# EAGLE board arm shield design mirrored along length (EAGLE 7.2.0)
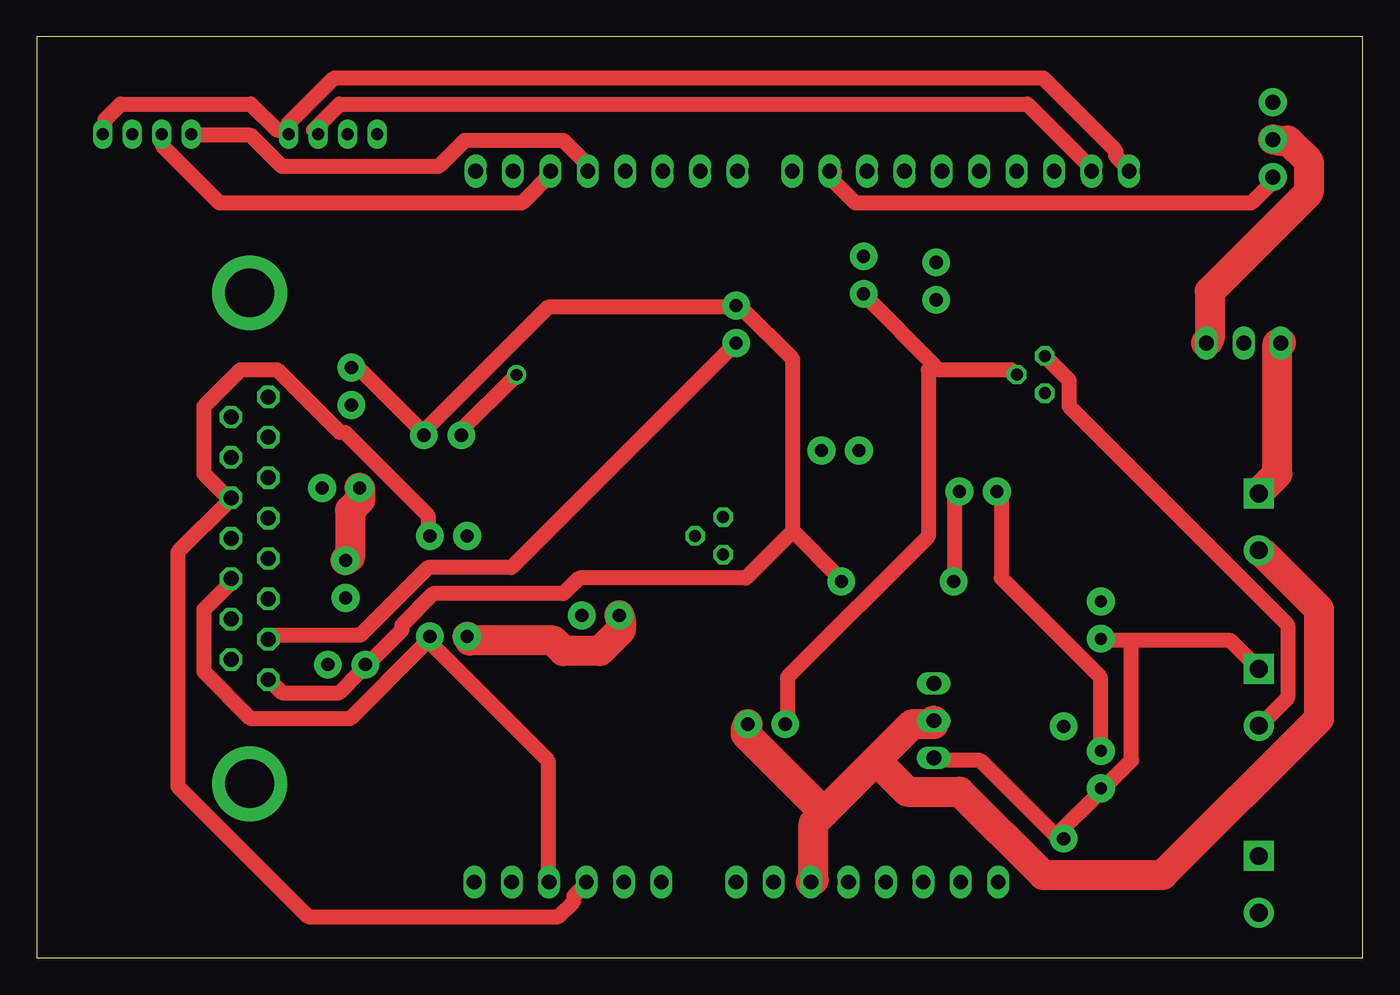
[diagram p0: board, top side]
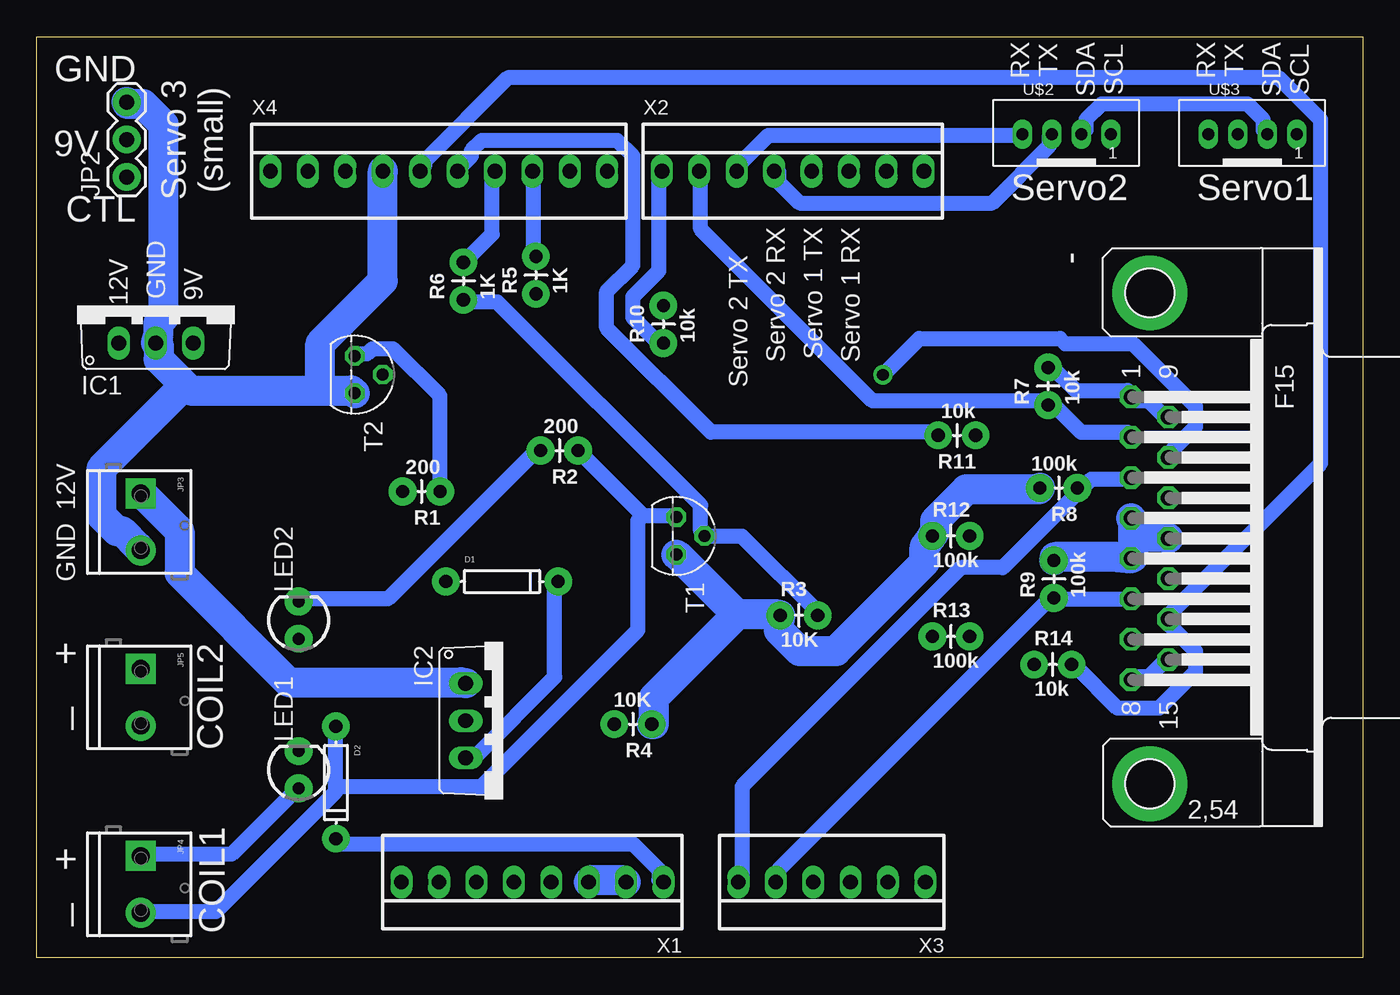
[diagram p1: board, bottom side, seen from below]

Size 90 x 62.54 mm. Coordinates in mm from the lower left corner, seen from the top.
Outline: 0,0 90,0 90,62.54 0,62.54 0,0
Copper layers (1*16): Top 0.035mm / dielectric 1.5mm / Bottom 0.035mm
Design rules "Othermill-DRC-1-64": minimum track width 8mil, minimum drill 0.8mm, track to track 0.39878125mm, track to pad 0.39878125mm, pad to pad 0.39878125mm, via to via 0.39878125mm, smd to smd 0mil, copper to edge 0mil, drill to drill 1mil, minimum pad ring 10mil, minimum via ring 10mil, stop-mask expansion 1mil, vias tented up to drill 30mil, thermal gap 10mil
Net classes: 0 default: width 1.016 mm; 1 12VPower: width 2.032 mm; 2 9VPower: width 2.032 mm

## Footprints (pad centres in the part's own frame; a part is rotated, then mirrored left to right if it is on the bottom)
F15HP = drill 1.016 octagon: 1 -9.601,-1.27; 2 -6.858,-1.27; 3 -4.115,-1.27; 4 -1.372,-1.27; 5 1.372,-1.27; 6 4.115,-1.27; 7 6.858,-1.27; 8 9.601,-1.27; 9 -8.23,1.27; 10 -5.486,1.27; 11 -2.743,1.27; 12 0,1.27; 13 2.743,1.27; 14 5.486,1.27; 15 8.23,1.27 | drill 3.302 pad 5.08: G1 -16.662,0; G2 16.662,0
DIODE-1N4148 = drill 0.9 pad 1.88: A -3.81,0; C 3.81,0
TO220V = drill 1.016 long: 1 -2.54,-2.54; 2 0,-2.54; 3 2.54,-2.54
1X03 = drill 1.016 pad 1.88: 1 0,0; 2 2.54,0; 3 5.08,0
SCREWTERMINAL-3.5MM-2_LOCK = drill 1.2 pad 2.032 square: 1 -0.178,0 | drill 1.2 pad 2.032: 2 3.678,0
LED3MM = drill 0.813 pad 1.88: A -1.27,0; K 1.27,0
AXIAL-0.1 = drill 0.9 pad 1.88: P$1 0,0; P$2 2.54,0
TO92 = drill 0.813 octagon: 1 1.27,0; 2 0,1.905; 3 -1.27,0
JST_B4B-PH_HEADER = drill 0.8 long: P1 2.98,0.048; P2 0.98,0.048; P3 -1.02,0.048; P4 -3.02,0.048
22-23-2081 = drill 1 long: 1 -8.89,0; 2 -6.35,0; 3 -3.81,0; 4 -1.27,0; 5 1.27,0; 6 3.81,0; 7 6.35,0; 8 8.89,0
22-23-2061 = drill 1 long: 1 -6.35,0; 2 -3.81,0; 3 -1.27,0; 4 1.27,0; 5 3.81,0; 6 6.35,0
22-23-2101 = drill 1 long: 1 -11.43,0; 2 -8.89,0; 3 -6.35,0; 4 -3.81,0; 5 -1.27,0; 6 1.27,0; 7 3.81,0; 8 6.35,0; 9 8.89,0; 10 11.43,0

## Placement (x,y rotation side)
-  [F15HP]  14.45,28.5 270 bottom
D1  [DIODE-1N4148]  58.42,25.56 0 bottom
D2  [DIODE-1N4148]  69.69,11.91 270 bottom
IC1  7809T  [TO220V]  81.92,44.29 0 bottom
IC2  7805TV  [TO220V]  58.34,16.11 270 bottom
JP2  [1X03]  83.9,53.02 90 bottom
JP3  M023.5MM_LOCK  [SCREWTERMINAL-3.5MM-2_LOCK]  82.95,31.35 270 bottom
JP4  RELAY2  [SCREWTERMINAL-3.5MM-2_LOCK]  82.95,6.75 270 bottom
JP5  RELAY1  [SCREWTERMINAL-3.5MM-2_LOCK]  82.95,19.45 270 bottom
LED1  [LED3MM]  72.23,12.78 90 bottom
LED2  [LED3MM]  72.23,22.94 90 bottom
R1  200  [AXIAL-0.1]  62.63,31.67 180 bottom
R2  200  [AXIAL-0.1]  53.26,34.45 180 bottom
R3  10K  [AXIAL-0.1]  39.53,23.26 0 bottom
R4  10K  [AXIAL-0.1]  48.26,15.88 180 bottom
R5  1K  [AXIAL-0.1]  56.12,45.08 90 bottom
R6  1K  [AXIAL-0.1]  61.04,44.69 90 bottom
R7  10k  [AXIAL-0.1]  21.35,37.54 90 bottom
R8  100k  [AXIAL-0.1]  19.37,31.91 180 bottom
R9  100k  [AXIAL-0.1]  20.95,24.45 90 bottom
R10  10k  [AXIAL-0.1]  47.47,41.75 90 bottom
R11  10k  [AXIAL-0.1]  26.27,35.48 180 bottom
R12  100k  [AXIAL-0.1]  29.21,28.65 0 bottom
R13  100k  [AXIAL-0.1]  29.21,21.83 0 bottom
R14  10k  [AXIAL-0.1]  22.3,19.92 0 bottom
T1  BC547  [TO92]  46.59,28.65 270 bottom
T2  BC547  [TO92]  68.42,39.61 270 bottom
U$2  JST-PH_4-PIN_HEADER  [JST_B4B-PH_HEADER]  20.08,55.88 0 bottom
U$3  JST-PH_4-PIN_HEADER  [JST_B4B-PH_HEADER]  7.46,55.88 0 bottom
X1  22-23-2081  [22-23-2081]  56.36,5.16 180 bottom
X2  22-23-2081  [22-23-2081]  38.68,53.42 0 bottom
X3  [22-23-2061]  36.04,5.16 180 bottom
X4  22-23-2101  [22-23-2101]  62.71,53.42 0 bottom

## Library data of the parts
- = con-subd; OC_FARNELL: unknown; OC_NEWARK: unknown
D1 D2 = SparkFun-DiscreteSemi
IC1 IC2 = linear
JP2-JP5 = SparkFun-Connectors
LED1 LED2 = SparkFun-LED
R1-R14 = SparkFun-Resistors
T1 T2 = transistor
U$2 U$3 = SRG; MPN: S4B-PH-K-S(LF)(SN)
X1 X2 = con-molex; MF: MOLEX; MPN: 22-23-2081; OC_FARNELL: 1756826; OC_NEWARK: 01C7592
X3 = con-molex; MF: MOLEX; MPN: 22-23-2061; OC_FARNELL: 1462922; OC_NEWARK: 27C1933
X4 = con-molex; MF: MOLEX; MPN: 22-23-2101; OC_FARNELL: 1756828; OC_NEWARK: 94C0765

## Nets
5V: -.1 -.8 -.9 -.15 D1.C D2.C IC2.3 JP4.1 JP5.1 LED1.A LED2.A R7.P$2 R10.P$2 R11.P$1 R14.P$1 X1.1
9V [9VPower]: IC1.3 JP2.2
12V [12VPower]: IC1.1 IC2.1 JP3.1
A0: -.3 R8.P$1 X3.6
A1: -.6 R9.P$1 X3.5
A2: -.11 R12.P$2 X3.4
A3: -.13 R13.P$2 X3.3
A4: X3.2
A5: X3.1
GND [12VPower]: -.4 -.5 -.12 IC1.2 IC2.2 JP2.3 JP3.2 R3.P$1 R4.P$1 R8.P$2 R9.P$2 R12.P$1 R13.P$1 T1.1 T2.1 X1.2 X1.3 X4.4
N$3: D1.A JP5.2 R1.P$1 T2.3
N$4: D2.A JP4.2 R2.P$1 T1.3
N$5: LED1.K R1.P$2
N$6: R3.P$2 R6.P$1 T1.2
N$7: LED2.K R2.P$2
N$8: R4.P$2 R5.P$1 T2.2
PIN2: U$3.P3 X2.6
PIN3: U$3.P4 X2.5
PIN4: U$2.P3 X2.4
PIN5: U$2.P4 X2.3
PIN6: -.2 R7.P$1 X2.2
PIN7: -.7 R10.P$1 X2.1
PIN8: X4.10
PIN9: JP2.1 X4.9
PIN10: R5.P$2 X4.8
PIN11: R6.P$2 X4.7
PIN12: -.10 R11.P$2 X4.6
PIN13: -.14 R14.P$2 X4.5
SCL: U$2.P1 U$3.P1 X4.1
SDA: U$2.P2 U$3.P2 X4.2

## Tracks (layer width: path | path; a pad name or v marks a point on that pad's centre or on a via)
5V
  Top 1.016: R7.P$2 21.6,40.29 26.2,35.7 R11.P$1 26.55,36.05 34.69,44.19 47.07,44.19 R10.P$2 47.78,44.19 51.31,40.65 51.31,28.98 | 74.3,21.55 81.02,21.55 82.79,19.78 JP5.1 | 74.3,21.55 72.53,21.55 LED2.A | -.8 15.94,18.72 16.65,18.01 20.54,18.01 21.96,19.43 21.96,19.78 R14.P$1 22.66,20.13 24.79,22.26 24.79,22.61 26.91,24.73 35.75,24.73 36.81,25.79 48.13,25.79 51.31,28.98 | IC2.3 61.22,13.41 64.05,13.41 69.35,8.11 D2.C 69.35,8.46 72.18,11.29 LED1.A 72.53,11.65 74.3,13.41 74.3,21.55 | 51.31,28.98 54.5,25.79 D1.C
  Bottom 1.016: -.9 13.47,36.76 14.53,37.82 15.59,37.82 -.1 15.94,38.53 19.48,38.53 21.25,40.29 R7.P$2 | -.8 15.59,19.07 14.53,19.07 13.47,20.13 -.15 | X1.1 47.78,5.28 47.78,5.99 49.55,7.75 69.35,7.75 D2.C | D1.C 54.85,25.44 54.85,19.07 60.16,13.77 60.86,13.77 IC2.3 | JP4.1 82.79,7.05 76.78,7.05 72.53,11.29 LED1.A
9V
  Top 2.032: IC1.3 79.61,42.06 79.61,45.25 86.33,51.97 86.33,54.09 84.92,55.5 84.21,55.5 JP2.2
12V
  Top 2.032: IC1.1 84.21,41.71 84.21,32.87 83.15,31.81 JP3.1
  Bottom 2.032: IC2.1 61.22,18.72 72.89,18.72 80.32,26.15 80.32,28.98 82.79,31.45 JP3.1
A0
  Bottom 1.016: X3.6 42.12,5.28 42.12,11.65 27.26,26.5 24.43,26.5 19.13,31.81 R8.P$1 18.77,32.16 18.42,32.51 15.94,32.51 -.3
A1
  Bottom 1.016: X3.5 39.64,5.28 39.64,5.99 21.25,24.38 R9.P$1 20.54,24.38 15.94,24.38 -.6
A2
  Top 1.016: X3.4 37.17,4.93 36.46,4.22 36.46,3.86 35.4,2.8 18.42,2.8 9.58,11.65 9.58,27.56 13.12,31.1 -.11 12.76,31.45 11.35,32.87 11.35,37.47 13.82,39.94 16.3,39.94 20.54,35.7 20.9,35.7 26.55,30.04 26.55,28.98 R12.P$2
A3
  Top 1.016: X3.3 34.69,5.28 34.69,13.41 26.55,21.55 R13.P$2 26.2,21.2 21.25,16.24 14.53,16.24 11.35,19.43 11.35,23.67 13.12,25.44 -.13
GND
  Top 2.032: 53.44,9.88 52.73,9.17 52.73,5.28 X1.3 | 53.44,9.88 56.97,13.41 | 56.97,13.41 59.45,15.89 60.86,15.89 IC2.2 | 53.44,9.88 48.13,15.18 48.13,15.54 R4.P$1 | R9.P$2 21.25,27.21 21.25,30.39 21.96,31.1 21.96,31.81 R8.P$2 | R13.P$1 29.39,21.55 35.04,21.55 35.75,20.84 38.23,20.84 39.64,22.26 39.64,22.96 R3.P$1 | 56.97,13.41 59.09,11.29 62.63,11.29 68.29,5.63 76.43,5.63 87.04,16.24 87.04,23.67 83.15,27.56 JP3.2
  Bottom 2.032: 70.77,38.53 79.61,38.53 79.96,38.88 | 70.77,38.53 68.64,38.53 T2.1 | 79.96,38.88 81.73,40.65 81.73,41.71 IC1.2 81.73,42.42 81.73,43.12 81.38,43.48 81.38,56.56 82.79,57.98 83.85,57.98 JP2.3 | 70.77,38.53 70.77,41.71 66.52,45.95 66.52,53.38 X4.4 | 79.96,38.88 85.62,33.22 85.62,30.04 84.56,28.98 84.21,28.98 83.15,27.92 JP3.2 | X1.3 52.38,5.28 50.25,5.28 X1.2 | 15.59,28.62 15.59,29.68 -.4 | 15.59,28.62 15.59,27.21 -.5 16.65,27.21 20.9,27.21 R9.P$2 | 15.59,28.62 13.47,28.62 -.12 | R8.P$2 21.96,31.81 26.91,31.81 29.03,29.68 29.03,28.98 R12.P$1 29.74,27.92 29.74,26.85 35.75,20.84 38.23,20.84 39.64,22.26 R3.P$1 39.64,23.32 42.47,23.32 | 42.47,23.32 46.36,27.21 T1.1 | 42.47,23.32 48.13,17.66 48.13,15.89 R4.P$1
N$3
  Top 1.016: D1.A 62.28,25.79 62.28,31.45 R1.P$1 | JP5.2 83.15,15.89 84.92,17.66 84.92,22.61 70.06,37.47 70.06,39.23 68.64,40.65 T2.3
  Bottom 1.016: T2.3 68.29,41 67.58,41 67.23,41.36 65.81,41.36 62.63,38.17 62.63,31.81 R1.P$1
N$4
  Bottom 1.016: 48.84,30.04 46.72,30.04 T1.3 | 48.84,30.04 53.08,34.28 R2.P$1 | 69.71,11.65 69.71,11.29 77.84,3.16 82.79,3.16 JP4.2 | 69.71,11.65 69.71,15.54 D2.A | 69.71,11.65 59.8,11.65 49.19,22.26 49.19,29.68 48.84,30.04
N$5
  Top 1.016: LED1.K 72.18,14.12 72.18,19.07 65.46,25.79 65.46,31.45 R1.P$2
N$6
  Bottom 1.016: R3.P$2 36.81,23.32 42.12,28.62 44.59,28.62 T1.2 44.95,28.98 44.95,30.75 58.74,44.54 60.86,44.54 R6.P$1
N$7
  Bottom 1.016: LED2.K 72.18,24.38 66.17,24.38 55.91,34.64 R2.P$2
N$8
  Top 1.016: 60.86,40.29 56.27,44.89 R5.P$1 | 60.86,40.29 61.22,39.94 66.17,39.94 T2.2 | R4.P$2 50.96,15.89 50.96,19.07 60.51,28.62 60.51,39.94 60.86,40.29
PIN2
  Top 1.016: U$3.P3 8.52,55.86 8.52,55.15 12.41,51.26 32.92,51.26 35.04,53.38 X2.6
PIN3
  Top 1.016: U$3.P4 10.64,55.86 14.53,55.86 16.65,53.74 27.26,53.74 29.03,55.5 35.75,55.5 37.52,53.74 X2.5
PIN4
  Bottom 1.016: U$2.P3 21.25,55.86 21.25,55.15 25.14,51.26 38.23,51.26 39.64,52.67 39.64,53.38 X2.4
PIN5
  Bottom 1.016: U$2.P4 23.37,55.86 40.35,55.86 42.47,53.74 X2.3
PIN6
  Bottom 1.016: X2.2 44.95,53.38 44.95,49.49 33.27,37.82 21.6,37.82 R7.P$1 20.9,37.47 19.13,35.7 15.94,35.7 -.2
PIN7
  Top 1.016: -.7 15.94,21.9 21.96,21.9 26.55,26.5 32.21,26.5 47.42,41.71 R10.P$1
  Bottom 1.016: X2.1 47.78,53.38 47.78,46.66 49.55,44.89 49.55,43.48 47.78,41.71 R10.P$1
PIN9
  Top 1.016: X4.9 54.14,53.38 54.14,52.67 55.56,51.26 82.44,51.26 83.85,52.67 JP2.1
PIN10
  Bottom 1.016: X4.8 56.27,53.38 56.27,47.72 R5.P$2
PIN11
  Bottom 1.016: X4.7 59.09,53.38 59.09,49.14 60.86,47.37 R6.P$2
PIN12  (via drill 0.8)
  Top 1.016: v32.57,39.59 28.68,35.7 R11.P$2
  Bottom 1.016: X4.6 61.22,53.74 60.51,54.44 60.51,54.8 59.8,55.5 50.61,55.5 49.55,54.44 49.55,47.01 51.31,45.25 51.31,42.77 44.24,35.7 29.03,35.7 R11.P$2 | v32.57,39.59 30.09,42.06 20.54,42.06 20.19,41.71 15.59,41.71 11.35,37.47 11.35,36.05 13.12,34.28 -.10
PIN13
  Bottom 1.016: X4.5 63.69,53.74 63.69,54.09 58.03,59.75 5.69,59.75 2.86,56.92 2.86,33.57 13.12,23.32 -.14 13.12,22.61 11.35,20.84 11.35,19.43 13.82,16.95 16.65,16.95 19.48,19.78 R14.P$2
SCL
  Top 1.016: U$3.P1 4.63,56.21 4.63,56.92 5.69,57.98 14.53,57.98 16.3,56.21 17.01,56.21 U$2.P1 17.01,56.56 20.19,59.75 68.29,59.75 73.24,54.8 73.24,54.44 73.95,53.74 X4.1
SDA
  Top 1.016: X4.2 71.47,53.74 67.23,57.98 20.54,57.98 18.77,56.21 U$2.P2
  Bottom 1.016: U$2.P2 18.77,56.21 18.77,56.92 17.71,57.98 7.81,57.98 6.75,56.92 6.75,56.21 U$3.P2

## Text on the board
bNames: TX | RX | TX | RX | GND | SCL | SDA | SCL | SDA | 9V | Servo 3 / (small) | Servo1 | Servo2 | CTL | Servo 1 RX | Servo 1 TX | Servo 2 RX | GND | Servo 2 TX | 9V | 12V | 12V | GND | COIL2 | + | _ | + | _ | COIL1